# Altium PCB SigmaDelta.PcbDoc
Units mm, origin at the board's own origin, x right, y up, seen from the top; angles counter-clockwise.
Board outline 100 x 114.3 mm, 2 copper layers (Top Layer, Bottom Layer); 79 components, 44 nets, 262 pads, 64 vias.
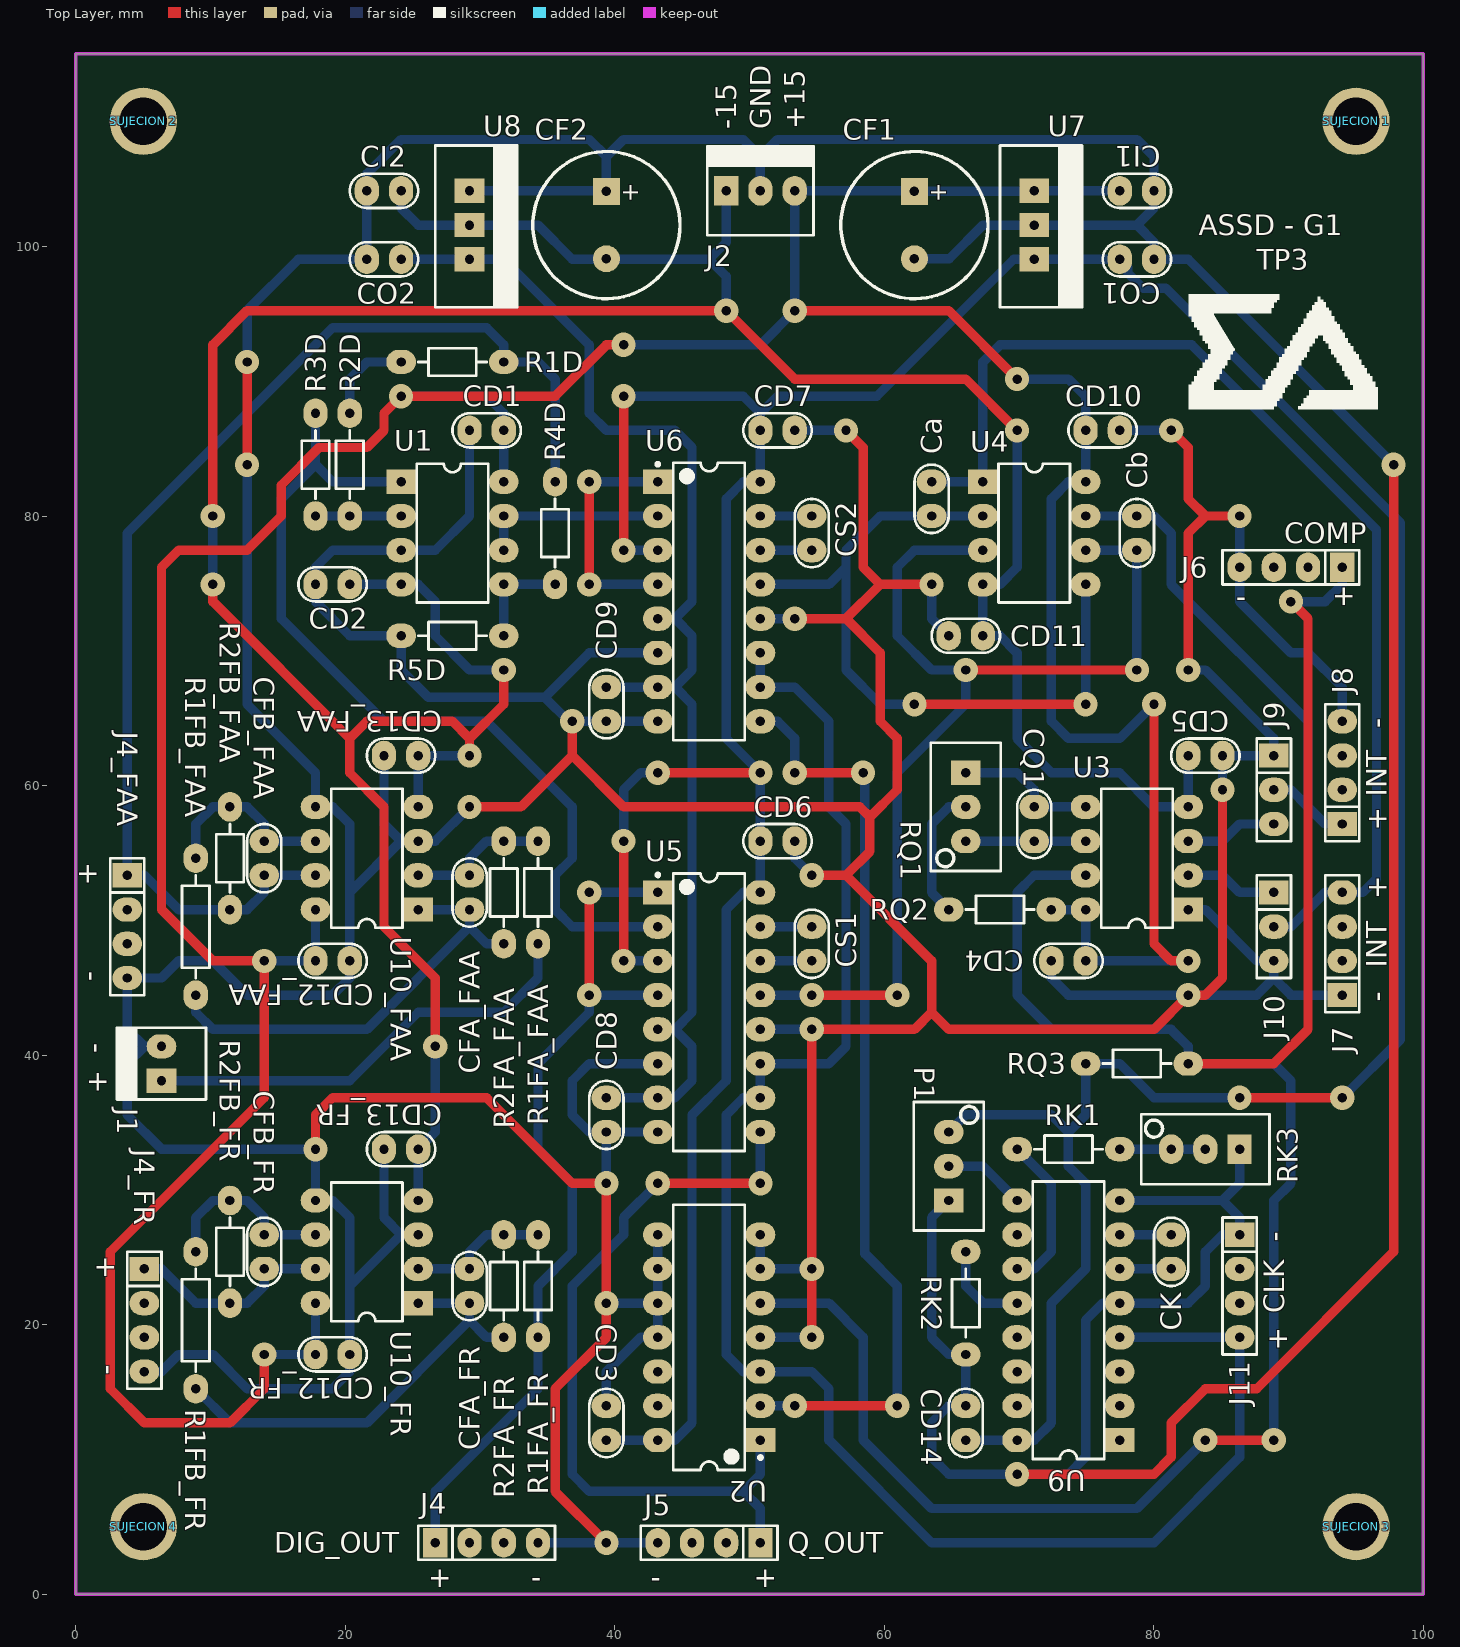
[diagram p0: Top Layer view]
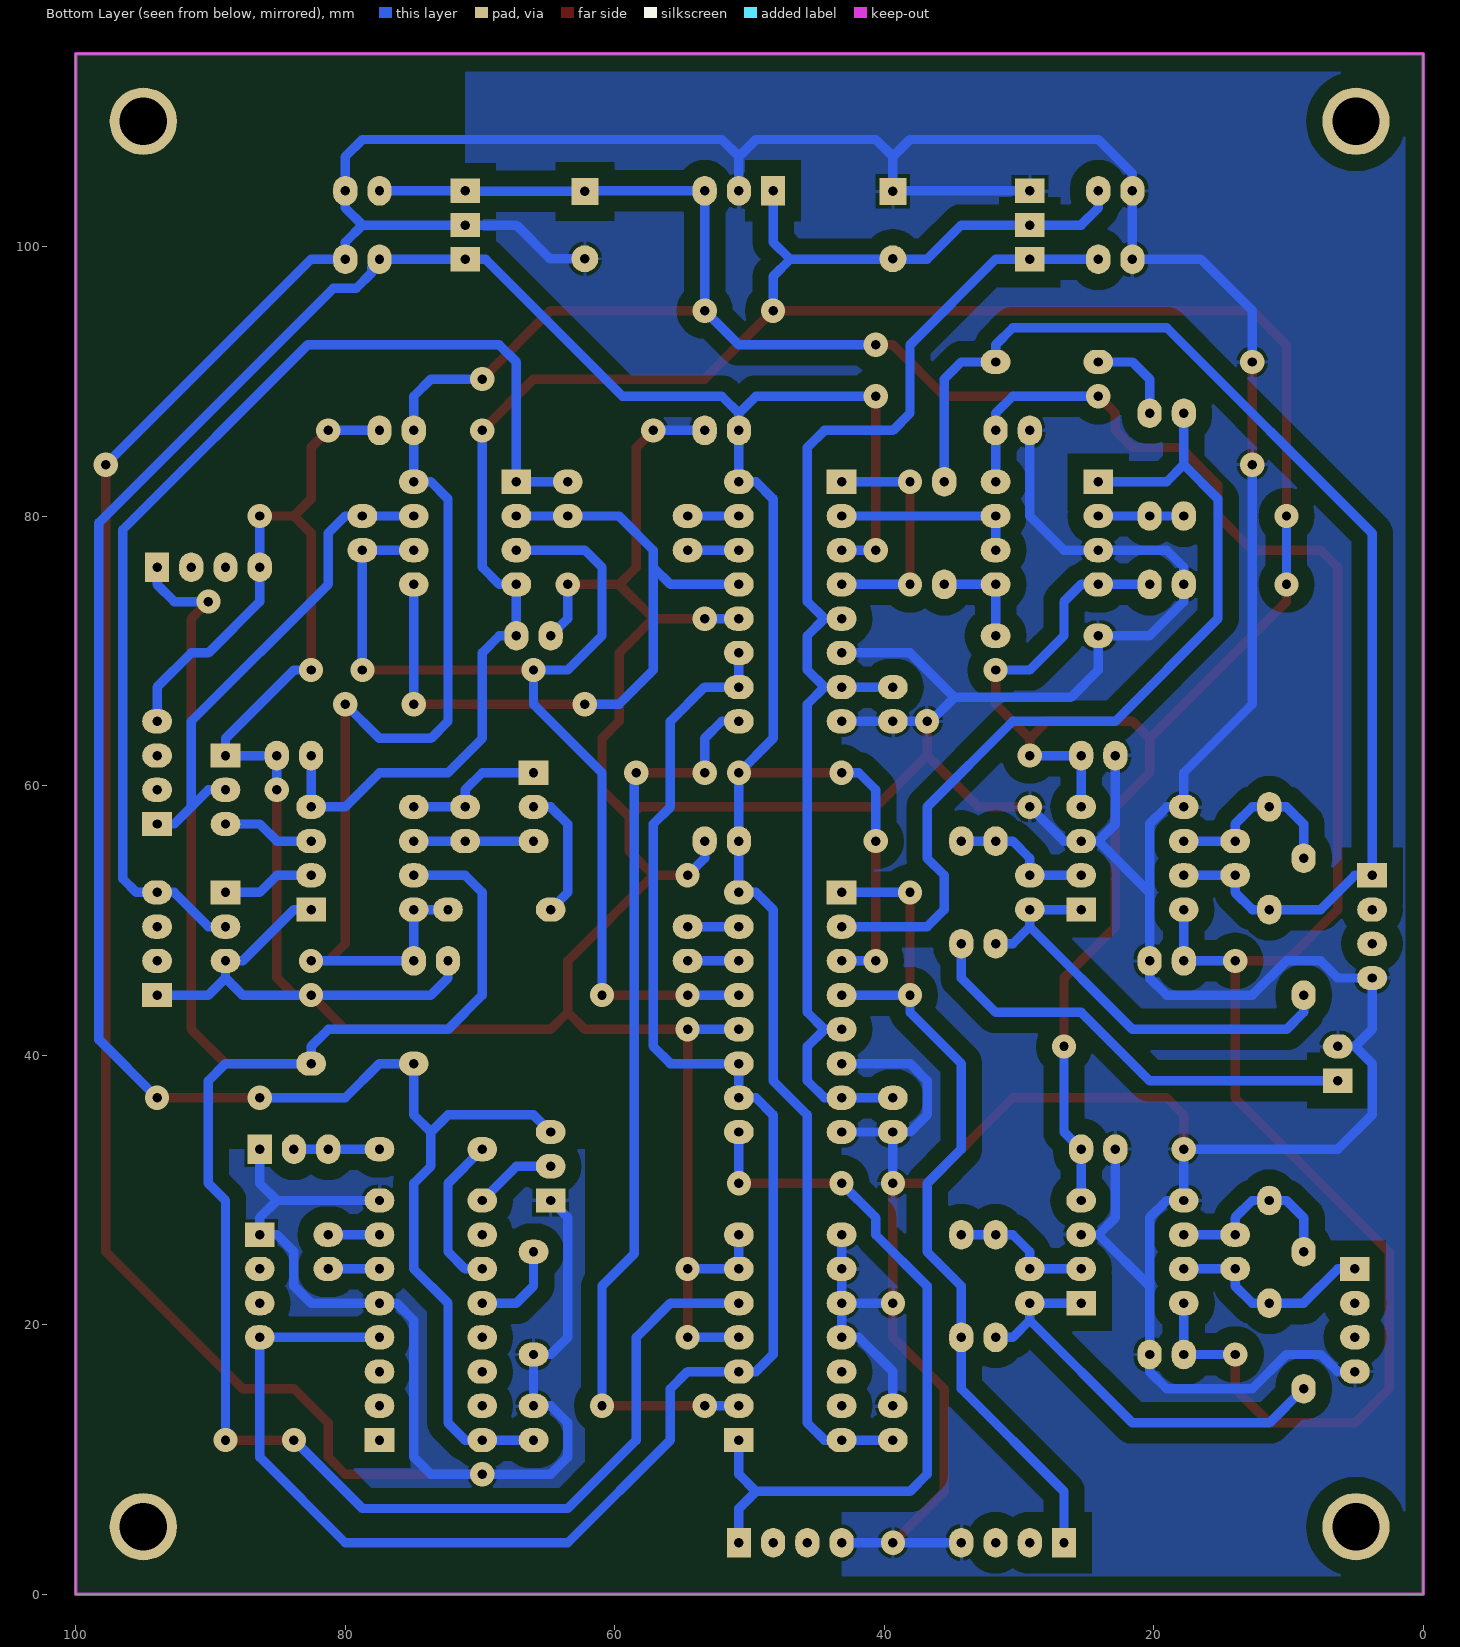
[diagram p1: Bottom Layer view, seen from below]
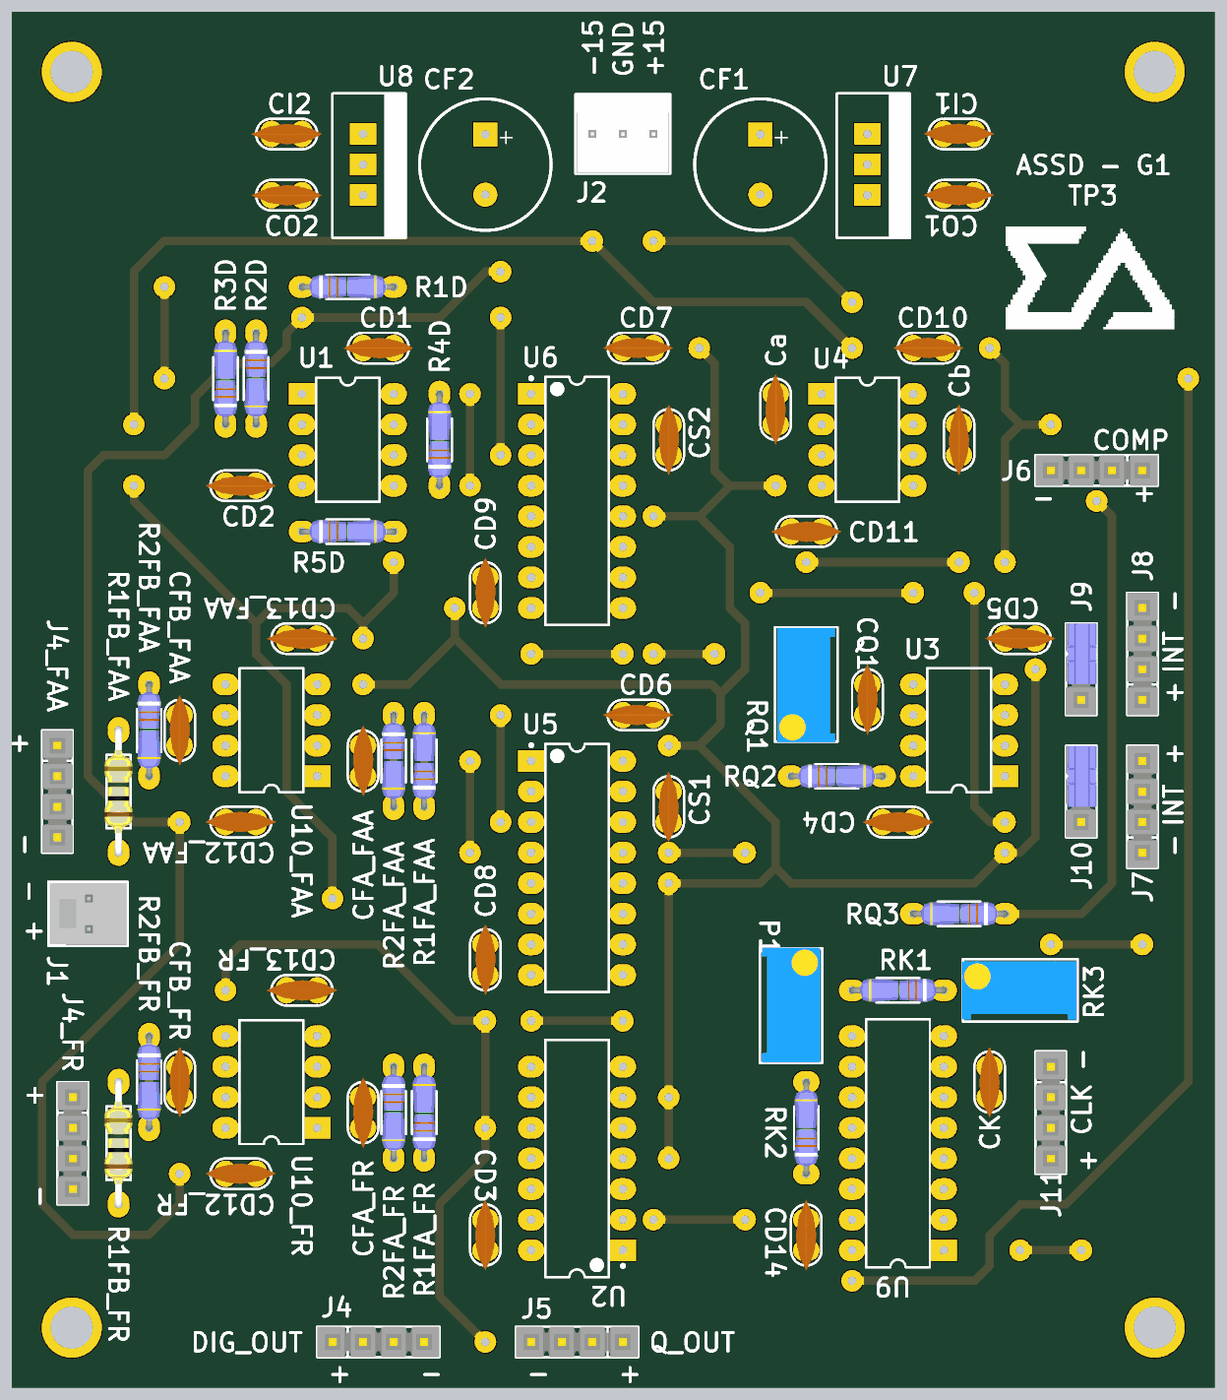
[diagram p2: 3D render of the assembled board from above, using the file's embedded part models]

## Layer stack, top to bottom
Top Solder: solder mask 0.0102, Solder Resist, Dk 3.5
Top Layer: signal copper 0.0356
Dielectric 1: dielectric 0.32, FR-4, Dk 4.8
Bottom Layer: signal copper 0.0356
Bottom Solder: solder mask 0.0102, Solder Resist, Dk 3.5

## Board outline
0,0 100,0 100,114.3 0,114.3

## Design rules (kind name [scope] priority, off if disabled: settings)
Clearance [All] p1: gap=0.7
PolygonConnect [All] p1: connectstyle=Relief reliefconductorwidth=0.254 reliefentries=4 polygonreliefangle="90 Angle" airgapwidth=0.254
RoutingVias [All] p1: holewidth=0.7 width=1.8 viastyle="Through Hole" minholewidth=0.7 minwidth=1.8 maxholewidth=0.7 maxwidth=1.8
SolderMaskExpansion [All] p1: expansion=0.102
Width [All] p1: maxlimit=0.7 minlimit=0.7 preferedwidth=0.7
30 further rules are at their usual default settings.

## Classes and differential pairs
component class ConversorSigmaDelta: J1 ROT6 "SUJECION 1" "SUJECION 2" "SUJECION 3" "SUJECION 4"
component class FAA: CD12_FAA CD13_FAA CFA_FAA CFB_FAA J4_FAA R1FA_FAA R1FB_FAA R2FA_FAA R2FB_FAA ROT8_FAA U10_FAA
component class FR: CD12_FR CD13_FR CFA_FR CFB_FR J4_FR R1FA_FR R1FB_FR R2FA_FR R2FB_FR ROT8_FR U10_FR
component class U_Alimentacion: CF1 CF2 CI1 CI2 CO1 CO2 J2 ROT5 U7 U8
component class U_EntradaDiferencial: CD1 CD2 R1D R2D R3D R4D R5D ROT1 U1
component class U_FFD: CD3 J5 ROT2 U2
component class U_Oscilador: CD14 CK J11 P1 RK1 RK2 RK3 ROT7 U9
component class U_Quantizer: CD4 CD5 CQ1 J6 J7 J8 J9 J10 ROT3 RQ1 RQ2 RQ3 U3
component class U_SC_Integrador: Ca Cb CD6 CD7 CD8 CD9 CD10 CD11 CS1 CS2 J4 ROT4 U4 U5 U6
channel class Filtro: FAA FR

## Components (designator, comment, footprint, x,y, rotation, side; value= is the part's Value field where it differs from the comment)
Ca "100n" CAP100 63.5,81.28 r90 top
Cb "100n" CAP100 78.74,78.74 r90 top
CD1 "100n" CAP100 30.48,86.36 r180 top
CD2 "100n" CAP100 19.05,74.93 r180 top
CD3 "100n" CAP100 39.37,12.7 r90 top
CD4 "100n" CAP100 73.66,46.99 r180 top
CD5 "100n" CAP100 83.82,62.23 r0 top
CD6 "100n" CAP100 52.07,55.88 r0 top
CD7 "100n" CAP100 52.07,86.36 r0 top
CD8 "100n" CAP100 39.37,35.56 r270 top
CD9 "100n" CAP100 39.37,66.04 r270 top
CD10 "100n" CAP100 76.2,86.36 r0 top
CD11 "100n" CAP100 66.04,71.12 r180 top
CD12_FAA "100n" CAP100 19.05,46.99 r0 top (schematic designator CD12)
CD12_FR "100n" CAP100 19.05,17.78 r0 top (schematic designator CD12)
CD13_FAA "100n" CAP100 24.13,62.23 r180 top (schematic designator CD13)
CD13_FR "100n" CAP100 24.13,33.02 r180 top (schematic designator CD13)
CD14 "100n" CAP100 66.04,12.7 r90 top
CF1 "330u" CAP200RP 62.23,101.6 r270 top
CF2 "330u" CAP200RP 39.37,101.6 r270 top
CFA_FAA "10n" CAP100 29.21,52.07 r270 top (schematic designator CFA)
CFA_FR "10n" CAP100 29.21,22.86 r270 top (schematic designator CFA)
CFB_FAA "10n" CAP100 13.97,54.61 r270 top (schematic designator CFB)
CFB_FR "10n" CAP100 13.97,25.4 r270 top (schematic designator CFB)
CI1 "220n" CAP100 78.74,104.14 r0 top
CI2 "220n" CAP100 22.86,104.14 r180 top
CK "100n" CAP100 81.28,25.4 r90 top
CO1 "100n" CAP100 78.74,99.06 r0 top
CO2 "100n" CAP100 22.86,99.06 r180 top
CQ1 "10n" CAP100 71.12,57.15 r270 top
CS1 "1n" CAP100 54.61,48.26 r90 top
CS2 "1n" CAP100 54.61,78.74 r270 top
J1 "INPUT" MOLEX2 6.35,38.1 r90 top
J2 "FUENTE" MOLEX3 48.26,104.14 r0 top
J4 "DIG_OUT" SIP4 30.48,3.81 r0 top
J4_FAA "F_OUT" SIP4 3.81,49.53 r270 top (schematic designator J4)
J4_FR "F_OUT" SIP4 5.08,20.32 r270 top (schematic designator J4)
J5 "DIG_OUT" SIP4 46.99,3.81 r180 top
J6 "OUT_COMP" SIP4 90.17,76.2 r180 top
J7 "+INT" SIP4 93.98,48.26 r90 top
J8 "-INT" SIP4 93.98,60.96 r90 top
J9 "CALIBRATE" JUMPER3 88.9,59.69 r270 top
J10 "CALIBRATE" JUMPER3 88.9,49.53 r270 top
J11 "CLK_OUT" SIP4 86.36,22.86 r270 top
P1 "10K" "PRESET V" 64.77,31.75 r90 top
R1D "1K" RES300#1 24.13,91.44 r0 top
R1FA_FAA "2K7" RES300#1 34.29,48.26 r90 top (schematic designator R1FA)
R1FA_FR "2K7" RES300#1 34.29,19.05 r90 top (schematic designator R1FA)
R1FB_FAA "2K7" RES400 8.89,44.45 r90 top (schematic designator R1FB)
R1FB_FR "2K7" RES400 8.89,15.24 r90 top (schematic designator R1FB)
R2D "1K" RES300#1 20.32,87.63 r270 top
R2FA_FAA "2K7" RES300#1 31.75,55.88 r270 top (schematic designator R2FA)
R2FA_FR "2K7" RES300#1 31.75,26.67 r270 top (schematic designator R2FA)
R2FB_FAA "2K7" RES300#1 11.43,58.42 r270 top (schematic designator R2FB)
R2FB_FR "2K7" RES300#1 11.43,29.21 r270 top (schematic designator R2FB)
R3D "1K" RES300#1 17.78,80.01 r90 top
R4D "1K" RES300#1 35.56,74.93 r90 top
R5D "1K" RES300#1 24.13,71.12 r0 top
RK1 "RES" RES300#1 77.47,33.02 r180 top
RK2 "RES" RES300#2 66.04,17.78 r90 top
RK3 "10K" "PRESET V" 83.82,33.02 r180 top
RQ1 "5K" "PRESET V" 66.04,58.42 r270 top
RQ2 "3K3" RES300#1 64.77,50.8 r0 top
RQ3 "1K" RES300#1 82.55,39.37 r180 top
"SUJECION 1" "SUJECION" "SUJECION (5.00MM - 3.50MM)" 95,109.3 r90 top
"SUJECION 2" "SUJECION" "SUJECION (5.00MM - 3.50MM)" 5,109.3 r90 top
"SUJECION 3" "SUJECION" "SUJECION (5.00MM - 3.50MM)" 95,5 r90 top
"SUJECION 4" "SUJECION" "SUJECION (5.00MM - 3.50MM)" 5,5 r90 top
U1 "TL082JG" JG008 27.94,78.74 r270 top
U2 "CD4013BCN" N14A 46.99,19.05 r180 top
U3 "LM311N" 626-05 78.74,54.61 r90 top
U4 "TL082JG" JG008 71.12,78.74 r270 top
U5 "CD4053BCN" N16E#1 46.99,43.18 r0 top
U6 "CD4053BCN" N16E#1 46.99,73.66 r0 top
U7 "7805" "TO-220 V" 71.12,101.6 r270 top
U8 "7905" "TO-220 V" 29.21,101.6 r270 top
U9 "CD4046BCN" N16E#2 73.66,20.32 r90 top
U10_FAA "TL082JG" JG008 21.59,54.61 r90 top (schematic designator U10)
U10_FR "TL082JG" JG008 21.59,25.4 r90 top (schematic designator U10)

## Footprints (in the part's own frame and the unit in brackets; to place one, negate y for a bottom-side part, rotate by r counter-clockwise, add the part's x,y. Pads: shape width x height; smd on the part's side, far side on the other; paste and mask are expansions set on the pad)
626-05 [mm] "DIP; 8 Leads; Row Spacing 7.62 mm; Pitch 2.54 mm"
  rect 1.8x2.2 hole 0.7: 1(-3.81,-3.81)
  oval 1.8x2.2 hole 0.7: 2(-1.27,-3.81) 3(1.27,-3.81) 4(3.81,-3.81) 5(3.81,3.81) 6(1.27,3.81) 7(-1.27,3.81) 8(-3.81,3.81)
  silkscreen extent -5.15,-2.65 5.15,2.65
CAP100 [mm]
  oval 1.8x2.2 hole 0.7: 1(-1.27,0) 2(1.27,0)
  silkscreen extent -2.54,-1.27 2.54,1.27, body extent -2.92,-0.84 2.92,0.86, height 6.12
CAP200RP [mm] "Body Diameter 10.33mm"
  rect 2x2 hole 0.7: 1(-2.5,0)
  round 2 hole 0.7: 2(2.5,0)
  silkscreen extent -5.46,-5.46 5.46,5.46, body extent -5.2,-5.18 5.18,5.21, height 20
JG008 [mm] "DIP; 8 Leads; Row Spacing 7.62 mm; Pitch 2.54 mm"
  rect 1.8x2.2 hole 0.7: 1(-3.81,-3.81)
  oval 1.8x2.2 hole 0.7: 2(-1.27,-3.81) 3(1.27,-3.81) 4(3.81,-3.81) 5(3.81,3.81) 6(1.27,3.81) 7(-1.27,3.81) 8(-3.81,3.81)
  silkscreen extent -5.15,-2.65 5.15,2.65
JUMPER3 [mm]
  rect 1.8x2.2 hole 0.7: 1(-2.54,0)
  oval 1.8x2.2 hole 0.7: 2(0,0) 3(2.54,0)
  silkscreen extent -3.81,-1.27 3.81,1.27, body extent -3.81,-1.3 3.81,1.27, height 16.15
MOLEX2 [mm]
  rect 1.8x2.2 hole 0.7: 1(0,0)
  oval 1.8x2.2 hole 0.7: 2(2.54,0)
  silkscreen extent -1.4,-3.3 3.94,3.3, body extent -1.27,-3.17 3.81,3.18, height 10.74
MOLEX3 [mm]
  rect 1.8x2.2 hole 0.7: 1(0,0)
  oval 1.8x2.2 hole 0.7: 2(2.54,0) 3(5.08,0)
  silkscreen extent -1.4,-3.3 6.48,3.3, body extent -1.27,-3.17 6.35,3.17, height 10.74
N14A [mm] "DIP, 14-Leads, Row Spacing 7.62mm, Pitch 2.54mm, Body 19.18x6.35mm"
  rect 2.2x1.8 hole 0.7: 1(-3.81,7.62)
  oval 2.2x1.8 hole 0.7: 2(-3.81,5.08) 3(-3.81,2.54) 4(-3.81,0) 5(-3.81,-2.54) 6(-3.81,-5.08) 7(-3.81,-7.62) 8(3.81,-7.62) 9(3.81,-5.08) 10(3.81,-2.54) 11(3.81,0) 12(3.81,2.54) 13(3.81,5.08) 14(3.81,7.62)
  silkscreen extent -3.94,-9.85 2.65,9.85, body extent -3.55,-9.85 3.55,9.85, height 5.08
N16E#1 [mm] "DIP, 16-Leads, Row Spacing 7.62mm, Pitch 2.54mm, Body 19.3x6.35mm"
  rect 2.2x1.8 hole 0.7: 1(-3.81,8.89)
  oval 2.2x1.8 hole 0.7: 2(-3.81,6.35) 3(-3.81,3.81) 4(-3.81,1.27) 5(-3.81,-1.27) 6(-3.81,-3.81) 7(-3.81,-6.35) 8(-3.81,-8.89) 9(3.81,-8.89) 10(3.81,-6.35) 11(3.81,-3.81) 12(3.81,-1.27) 13(3.81,1.27) 14(3.81,3.81) 15(3.81,6.35) 16(3.81,8.89)
  silkscreen extent -3.93,-10.3 2.65,10.31, body extent -3.6,-10.28 3.6,10.28, height 5.08
N16E#2 [mm] "DIP; 16 Leads; Row Spacing 7.62 mm; Pitch 2.54 mm"
  rect 1.8x2.2 hole 0.7: 1(-8.89,-3.81)
  oval 1.8x2.2 hole 0.7: 2(-6.35,-3.81) 3(-3.81,-3.81) 4(-1.27,-3.81) 5(1.27,-3.81) 6(3.81,-3.81) 7(6.35,-3.81) 8(8.89,-3.81) 9(8.89,3.81) 10(6.35,3.81) 11(3.81,3.81) 12(1.27,3.81) 13(-1.27,3.81) 14(-3.81,3.81) 15(-6.35,3.81) 16(-8.89,3.81)
  silkscreen extent -10.3,-2.65 10.3,2.65
"PRESET V" [mm]
  rect 1.8x2.2 hole 0.7: 1(-2.54,0)
  oval 1.8x2.2 hole 0.7: 2(0,0) 3(2.54,0)
  silkscreen extent -4.76,-2.6 4.76,2.6, body extent -4.7,-2.42 4.83,2.42, height 11.55
RES300#1 [mm]
  oval 2.2x1.8 hole 0.7: 1(0,0) 2(7.62,0)
  silkscreen extent 1.27,-1.02 6.35,1.02, body extent -0.25,-0.97 7.87,0.97, height 2.01
RES300#2 [mm]
  oval 1.8x2.2 hole 0.7: 1(0,0) 2(7.62,0)
  silkscreen extent 1.27,-1.02 6.35,1.02, body extent -0.25,-0.97 7.87,0.97, height 2.01
RES400 [mm]
  oval 2.2x1.8 hole 0.7: 1(0,0) 2(10.16,0)
  silkscreen extent 1.27,-1.02 8.89,1.02, body extent -0.3,-1.14 10.46,1.17, height 2.43
SIP4 [mm]
  rect 1.8x2.2 hole 0.7: 1(-3.81,0)
  oval 1.8x2.2 hole 0.7: 2(-1.27,0) 3(1.27,0) 4(3.81,0)
  silkscreen extent -5.08,-1.27 5.08,1.27, body extent -5.08,-1.27 5.08,1.27, height 8.38
"SUJECION (5.00MM - 3.50MM)" [mm]
  round 5 hole 3.5: 1(0,0)
"TO-220 V" [mm]
  rect 1.8x2.2 hole 0.7: 1(-2.54,0) 2(0,0) 3(2.54,0)
  silkscreen extent -5.9,-2.54 6.1,3.54, body extent -5,-2 5,3, height 18

## Part data
Ca Cb CD1 CD2 CD3 CD4 CD5 CD6 CD7 CD8 CD9 CD10 CD11 CD12_FAA CD12_FR CD13_FAA CD13_FR CD14 CFA_FAA CFA_FR CFB_FAA CFB_FR CI1 CI2 CK CO1 CO2 CQ1 CS1 CS2: library part CAP
CF1 CF2: library part CAPPOL
J1: library part MOLEX2
J2: library part MOLEX3
J4 J4_FAA J4_FR J5 J6 J7 J8 J11: library part CON4
J9 J10: library part JUMPER3
P1 RK3 RQ1: library part PRESET
R1D R1FA_FAA R1FA_FR R1FB_FAA R1FB_FR R2D R2FA_FAA R2FA_FR R2FB_FAA R2FB_FR R3D R4D R5D RQ2 RQ3: library part RES
U1 U4 U10_FAA U10_FR: "JFET-Input Operational Amplifier"
U2: "Dual D-Type Flip-Flop"
U3: "High-Performance Voltage Comparator"
U5 U6: "Triple 2-Channnel Analog Multiplexer/Demutiplexer"
U7: library part 78XX, "REGULDOR POSITIVO"
U8: library part 79XX, "REGULADOR NEGATIVO"
U9: "Micropower Phase-Locked Loop"

## Via types
v1: diameter 1.8, hole 0.7, Top Layer to Bottom Layer, 64 vias

## Nets (pads, with @x,y where several pads share a name; then routed paths per layer and width w, separated by ;. In a path a pad name is that pad's centre, name@x,y a point inside that pad or via, vN(x,y) a via of type N, cw(c..) or ccw(c..) an arc to the next point about the centre after c; other vN are vias at no path point)
+15V: CD1.1 CD4.1 CD10.1 CD12_FAA.1 CD12_FR.1 CF1.1 CI1.1 J2.3 RQ2.2 U1.8 U3.8 U4.8 U7.1 U10_FAA.8 U10_FR.8 | length 299.9
  Top Layer w0.7: v1(13.97,17.78) 13.97,15.24 11.43,12.7 5.08,12.7 2.54,15.24 2.54,25.4 13.97,36.83 v1(13.97,46.99) 10.16,46.99 6.35,50.8 6.35,76.2 7.62,77.47 12.7,77.47 15.24,80.01 15.24,82.296 18.034,85.09 21.59,85.09 22.86,86.36 22.86,87.63 v1(24.13,88.9) 35.56,88.9 39.37,92.71 v1(40.64,92.71) ; v1(53.34,95.25) 64.77,95.25 v1(69.85,90.17) ; v1(80.01,66.04) 80.01,48.26 81.28,46.99 v1(82.55,46.99)
  Bottom Layer w0.7: v1(13.97,17.78) CD12_FR.1 U10_FR.8 ; v1(13.97,46.99) CD12_FAA.1 U10_FAA.8 ; v1(24.13,88.9) 30.48,88.9 31.75,87.63 CD1.1 U1.8 ; v1(40.64,92.71) 50.8,92.71 v1(53.34,95.25) J2.3 CF1.1@62.19,104.14 ; CF1.1 U7.1@71.334,104.1 ; v1(69.85,90.17) 73.66,90.17 74.93,88.9 CD10.1 U4.8 73.66,82.55 72.39,81.28 72.39,64.77 73.66,63.5 77.47,63.5 v1(80.01,66.04) ; U7.1 CI1.1 ; RQ2.2 U3.8 CD4.1 v1(82.55,46.99)
+VREF: CD3.1 CD6.1 CD7.1 CD14.1 CO1.1 P1.3 RQ3.2 U2.14 U5.3 U5.16 U6.3 U6.16 U7.3 U9.16 | length 308.8
  Top Layer w0.7: v1(40.64,46.99) v1(40.64,55.88) ; v1(40.64,77.47) v1(40.64,88.9) ; v1(43.18,60.96) v1(50.8,60.96) ; v1(86.36,36.83) v1(93.98,36.83)
  Bottom Layer w0.7: CD3.1 U2.14 44.45,11.43 45.72,12.7 45.72,35.56 48.26,38.1 48.26,50.8 49.53,52.07 U5.16 CD6.1 v1(50.8,60.96) 48.26,63.5 48.26,81.28 49.53,82.55 U6.16 CD7.1 50.8,87.63 ; v1(40.64,46.99) U5.3 ; v1(40.64,55.88) 40.64,59.69 41.91,60.96 v1(43.18,60.96) ; v1(40.64,77.47) U6.3 ; v1(40.64,88.9) 49.53,88.9 50.8,87.63 ; P1.3 66.04,35.56 72.39,35.56 73.66,34.29 ; CD14.1 U9.16 71.12,11.43 72.39,12.7 72.39,21.59 74.93,24.13 74.93,30.48 73.66,31.75 73.66,34.29 ; v1(86.36,36.83) 80.01,36.83 77.47,39.37 RQ3.2 74.93,35.56 73.66,34.29 ; v1(93.98,36.83) 98.298,41.148 98.298,79.502 80.89,96.91 79.202,96.91 78.06,98.052 78.06,98.47 CO1.1 U7.3 69.596,99.06 59.436,88.9 52.07,88.9 50.8,87.63
-15V: CD2.1 CD5.1 CD11.1 CD13_FAA.1 CD13_FR.1 CF2.2 CI2.1 J2.1 U1.4 U3.4 U4.4 U8.2 U10_FAA.4 U10_FR.4 | length 256.5
  Top Layer w0.7: v1(10.16,74.93) 10.16,73.66 20.32,63.5 ; v1(10.16,80.01) 10.16,92.71 12.7,95.25 v1(48.26,95.25) 53.34,90.17 66.04,90.17 v1(69.85,86.36) ; v1(26.67,40.64) 26.67,45.72 22.86,49.53 22.86,58.42 20.32,60.96 20.32,63.5 ; v1(29.21,62.23) 29.21,63.5 ; v1(31.75,68.58) 31.75,66.04 29.21,63.5 ; 20.32,63.5 21.59,64.77 27.94,64.77 29.21,63.5
  Bottom Layer w0.7: v1(10.16,74.93) v1(10.16,80.01) ; CD2.1 U1.4 25.4,74.93 26.67,73.66 26.67,71.12 29.21,68.58 v1(31.75,68.58) ; CI2.1 24.13,102.87 25.4,101.6 U8.2 34.29,101.6 36.83,99.06 46.99,99.06 ; U10_FR.4 CD13_FR.1 26.67,34.29 v1(26.67,40.64) ; U10_FAA.4 CD13_FAA.1 v1(29.21,62.23) ; v1(48.26,95.25) 48.26,97.79 46.99,99.06 ; J2.1 48.26,100.33 46.99,99.06 ; v1(69.85,86.36) 69.85,76.2 68.58,74.93 U4.4 CD11.1 68.58,71.12 69.85,69.85 69.85,63.5 72.39,60.96 77.47,60.96 80.01,58.42 U3.4 CD5.1
-VREF: CD8.1 CD9.1 CO2.1 U5.5 U5.7 U6.5 U6.7 U8.3 | length 92.5
  Bottom Layer w0.7: CO2.1 U8.3 31.75,99.06 38.1,92.71 38.1,87.63 39.37,86.36 44.45,86.36 45.72,85.09 45.72,73.66 44.45,72.39 45.72,71.12 45.72,68.58 44.45,67.31 45.72,66.04 45.72,43.18 44.45,41.91 ; CD8.1 U5.7 44.45,36.83 45.72,38.1 45.72,40.64 44.45,41.91 ; CD9.1 U6.7 ; U5.5 44.45,41.91
CLK: J11.4 U2.3 U5.10 U5.11 U6.10 U6.11 U9.4 | length 130.1
  Bottom Layer w0.7: U6.11 U6.10 53.34,67.31 55.88,64.77 55.88,58.42 57.15,57.15 57.15,40.64 55.88,39.37 U5.11 U5.10 49.53,36.83 48.26,35.56 48.26,17.78 49.53,16.51 U2.3 54.61,16.51 55.88,15.24 55.88,11.43 63.5,3.81 80.01,3.81 86.36,10.16 J11.4 U9.4
DAC_1BIT_A: J4.1 R1FA_FR.1 U5.1 U5.4 | length 65.3
  Top Layer w0.7: v1(38.1,44.45) v1(38.1,52.07)
  Bottom Layer w0.7: J4.1 26.67,7.62 34.29,15.24 R1FA_FR.1 34.29,22.86 36.83,25.4 36.83,30.48 34.29,33.02 34.29,39.37 38.1,43.18 v1(38.1,44.45) U5.4 ; v1(38.1,52.07) U5.1
DAC_1BIT_B: U6.1 U6.4 | length 17.8
  Top Layer w0.7: v1(38.1,74.93) v1(38.1,82.55)
  Bottom Layer w0.7: v1(38.1,74.93) U6.4 ; v1(38.1,82.55) U6.1
GND: CD1.2 CD2.2 CD3.2 CD4.2 CD5.2 CD6.2 CD7.2 CD8.2 CD9.2 CD10.2 CD11.2 CD12_FAA.2 CD12_FR.2 CD13_FAA.2 CD13_FR.2 CD14.2 CF1.2 CF2.1 CI1.2 CI2.2 CO1.2 CO2.2 J1.2 J2.2 J4.4 J4_FAA.4 J4_FR.4 J5.4 J6.4 J7.1 J8.4 J9.1 J10.3 J11.1 P1.1 R5D.1 RK2.1 RK3.1 U1.3 U2.4 U2.6 U2.7 U2.8 U2.9 U2.10 U2.11 U3.1 U5.6 U5.8 U5.12 U6.6 U6.8 U6.12 U7.2 U8.1 U9.5 U9.8 U10_FAA.3 U10_FAA.5 U10_FR.3 U10_FR.5 | length 939
  Top Layer w0.7: v1(12.7,83.82) v1(12.7,91.44) ; v1(17.78,33.02) 17.78,35.56 19.05,36.83 30.48,36.83 36.83,30.48 v1(39.37,30.48) v1(39.37,21.59) 39.37,19.05 35.56,15.24 35.56,7.62 v1(39.37,3.81) ; v1(29.21,58.42) 33.02,58.42 36.83,62.23 ; v1(36.83,64.77) 36.83,62.23 ; v1(53.34,72.39) 57.15,72.39 ; v1(54.61,19.05) v1(54.61,24.13) v1(54.61,41.91) 62.23,41.91 63.5,43.18 ; v1(54.61,53.34) 57.15,53.34 ; v1(57.15,86.36) 58.42,85.09 58.42,76.2 59.69,74.93 ; v1(63.5,74.93) 59.69,74.93 ; v1(69.85,8.89) 80.01,8.89 81.28,10.16 81.28,12.7 83.82,15.24 87.63,15.24 97.79,25.4 v1(97.79,83.82) ; v1(81.28,86.36) 82.55,85.09 82.55,81.28 83.82,80.01 ; v1(82.55,68.58) 82.55,78.74 83.82,80.01 ; v1(85.09,59.69) 85.09,45.72 83.82,44.45 v1(82.55,44.45) 80.01,41.91 64.77,41.91 63.5,43.18 ; v1(86.36,80.01) 83.82,80.01 ; 36.83,62.23 40.64,58.42 58.166,58.42 58.928,57.658 ; 57.15,53.34 58.928,55.118 58.928,57.658 ; 57.15,53.34 63.5,46.99 63.5,43.18 ; 57.15,72.39 59.69,74.93 ; 57.15,72.39 59.69,69.85 59.69,64.77 60.96,63.5 60.96,59.69 58.928,57.658
  Bottom Layer w0.7: J4_FR.4 6.35,16.51 7.62,17.78 10.16,17.78 12.7,15.24 19.05,15.24 20.32,16.51 CD12_FR.2 20.32,22.86 ; J1.2 5.08,40.64 ; v1(12.7,83.82) 12.7,66.04 17.78,60.96 U10_FAA.5 19.05,58.42 20.32,57.15 20.32,52.07 ; v1(12.7,91.44) 12.7,95.25 16.51,99.06 CO2.2 CI2.2 21.59,105.41 24.13,107.95 38.1,107.95 39.37,106.68 ; CD13_FR.2 22.86,27.94 24.13,26.67 ; CD13_FAA.2 22.86,57.15 24.13,55.88 ; U10_FR.3 24.13,26.67 ; v1(29.21,58.42) 26.67,55.88 U10_FAA.3 24.13,55.88 ; CD1.2 29.21,80.01 26.67,77.47 U1.3 19.05,77.47 17.78,76.2 CD2.2 17.78,73.66 20.32,71.12 R5D.1 24.13,68.58 26.162,66.548 34.798,66.548 ; U8.1 CF2.1@39.33,104.14 ; J4.4 v1(39.37,3.81) J5.4 ; CD3.2 39.37,16.51 41.91,19.05 U2.11 U2.10 ; v1(39.37,21.59) U2.10 ; v1(39.37,30.48) CD8.2 ; CF2.1 39.37,106.68 ; U2.8 U2.9 U2.10 ; U5.8 CD8.2 ; U5.6 38.1,39.37 36.83,38.1 36.83,35.56 38.1,34.29 CD8.2 ; U6.8 CD9.2 v1(36.83,64.77) 36.576,64.77 34.798,66.548 ; U6.6 38.1,69.85 34.798,66.548 ; U2.4 v1(54.61,19.05) ; U2.7 U2.6 v1(54.61,24.13) ; U5.12 v1(54.61,41.91) ; U6.12 v1(53.34,72.39) ; J2.2 50.8,106.68 ; CD6.2 53.34,54.61 v1(54.61,53.34) ; CD7.2 v1(57.15,86.36) ; CF1.2 64.81,99.1 67.31,101.6 78.74,101.6 ; v1(63.5,74.93) 63.5,72.39 CD11.2 ; P1.1 63.5,27.94 63.5,19.05 64.77,17.78 RK2.1 CD14.2 64.77,13.97 63.5,12.7 63.5,10.16 64.77,8.89 v1(69.85,8.89) 73.66,8.89 74.93,10.16 74.93,20.32 76.2,21.59 U9.5 82.55,21.59 83.82,22.86 83.82,25.4 85.09,26.67 J11.1 86.36,27.94 85.09,29.21 ; CD4.2 72.39,45.72 73.66,44.45 v1(82.55,44.45) 87.63,44.45 88.9,45.72 ; U9.8 85.09,29.21 ; CD10.2 v1(81.28,86.36) ; U3.1 83.82,50.8 87.63,46.99 J10.3 88.9,45.72 ; v1(82.55,68.58) 83.82,68.58 88.9,63.5 J9.1 CD5.2 v1(85.09,59.69) ; RK3.1 86.36,30.48 85.09,29.21 ; v1(86.36,80.01) J6.4 86.36,73.66 90.17,69.85 91.44,69.85 93.98,67.31 J8.4 ; J7.1 90.17,44.45 88.9,45.72 ; v1(97.79,83.82) 82.55,99.06 CO1.2 80.01,100.33 78.74,101.6 ; 5.08,40.64 3.81,39.37 3.81,35.56 6.35,33.02 v1(17.78,33.02) U10_FR.5 19.05,29.21 20.32,27.94 20.32,22.86 ; 5.08,40.64 3.81,41.91 J4_FAA.4 6.35,45.72 7.62,46.99 10.16,46.99 12.7,44.45 19.05,44.45 20.32,45.72 CD12_FAA.2 20.32,52.07 ; 20.32,22.86 24.13,26.67 ; 20.32,52.07 24.13,55.88 ; 39.37,106.68 40.64,107.95 49.53,107.95 50.8,106.68 ; 50.8,106.68 52.07,107.95 78.74,107.95 80.01,106.68 CI1.2 80.01,102.87 78.74,101.6
NetCa_2: Ca.2 J7.4 J10.2 U4.1 | length 83.1
  Bottom Layer w0.7: Ca.2 U4.1 67.31,91.44 68.58,92.71 82.804,92.71 96.52,78.994 96.52,53.086 95.504,52.07 J7.4 92.71,52.07 90.17,49.53 J10.2
NetCb_2: Cb.2 J8.1 J9.2 U4.7 | length 37.5
  Bottom Layer w0.7: U4.7 Cb.2 80.01,80.01 81.28,78.74 81.28,74.93 91.44,64.77 91.44,58.42 ; J9.2 90.17,59.69 91.44,58.42 ; J8.1 92.71,57.15 91.44,58.42
NetCFA_FAA_1: CFA_FAA.1 R1FA_FAA.2 R2FA_FAA.1 U10_FAA.2 | length 10.7
  Bottom Layer w0.7: U10_FAA.2 CFA_FAA.1 29.21,54.61 30.48,55.88 R2FA_FAA.1 R1FA_FAA.2
NetCFA_FAA_2: CFA_FAA.2 R1FB_FAA.1 R2FA_FAA.2 U10_FAA.1 | length 33.4
  Bottom Layer w0.7: R1FB_FAA.1 8.89,43.18 10.16,41.91 21.59,41.91 29.21,49.53 ; U10_FAA.1 CFA_FAA.2 29.21,49.53 ; R2FA_FAA.2 30.48,48.26 29.21,49.53
NetCFA_FR_1: CFA_FR.1 R1FA_FR.2 R2FA_FR.1 U10_FR.2 | length 10.7
  Bottom Layer w0.7: U10_FR.2 CFA_FR.1 29.21,25.4 30.48,26.67 R2FA_FR.1 R1FA_FR.2
NetCFA_FR_2: CFA_FR.2 R1FB_FR.1 R2FA_FR.2 U10_FR.1 | length 32.7
  Bottom Layer w0.7: R1FB_FR.1 11.43,12.7 21.59,12.7 29.21,20.32 ; U10_FR.1 CFA_FR.2 29.21,20.32 ; R2FA_FR.2 30.48,19.05 29.21,20.32
NetCFB_FAA_1: CFB_FAA.1 R1FB_FAA.2 R2FB_FAA.1 U10_FAA.6 | length 13.8
  Bottom Layer w0.7: R1FB_FAA.2 8.89,57.15 10.16,58.42 R2FB_FAA.1 12.7,58.42 13.97,57.15 CFB_FAA.1 U10_FAA.6
NetCFB_FR_1: CFB_FR.1 R1FB_FR.2 R2FB_FR.1 U10_FR.6 | length 13.8
  Bottom Layer w0.7: R1FB_FR.2 8.89,27.94 10.16,29.21 R2FB_FR.1 12.7,29.21 13.97,27.94 CFB_FR.1 U10_FR.6
NetCFB_FR_2: CFB_FR.2 J4_FR.1 R2FB_FR.2 U10_FR.7 | length 15.5
  Bottom Layer w0.7: J4_FR.1 6.35,24.13 8.89,21.59 R2FB_FR.2 12.7,21.59 13.97,22.86 CFB_FR.2 U10_FR.7
NetCK_1: CK.1 U9.6 | length 3.8
  Bottom Layer w0.7: U9.6 CK.1
NetCK_2: CK.2 U9.7 | length 3.8
  Bottom Layer w0.7: U9.7 CK.2
NetCQ1_1: CQ1.1 RQ1.1 U3.5 | length 10.7
  Bottom Layer w0.7: RQ1.1 69.85,60.96 71.12,59.69 CQ1.1 U3.5
NetCQ1_2: CQ1.2 RQ1.3 U3.6 | length 8.9
  Bottom Layer w0.7: RQ1.3 CQ1.2 U3.6
NetCS1_1: CS1.1 U5.14 | length 3.8
  Bottom Layer w0.7: U5.14 CS1.1
NetCS1_2: CS1.2 U5.15 | length 3.8
  Bottom Layer w0.7: U5.15 CS1.2
NetCS2_1: CS2.1 U6.15 | length 3.8
  Bottom Layer w0.7: U6.15 CS2.1
NetCS2_2: CS2.2 U6.14 | length 3.8
  Bottom Layer w0.7: U6.14 CS2.2
NetJ1_1: J1.1 R1FA_FAA.1 | length 33.6
  Bottom Layer w0.7: J1.1 20.32,38.1 25.4,43.18 31.75,43.18 34.29,45.72 R1FA_FAA.1
NetJ5_1: J5.1 U2.1 U5.9 | length 57.5
  Top Layer w0.7: v1(43.18,30.48) v1(50.8,30.48)
  Bottom Layer w0.7: v1(43.18,30.48) 40.64,27.94 40.64,26.67 36.83,22.86 36.83,8.89 38.1,7.62 49.53,7.62 ; J5.1 50.8,6.35 49.53,7.62 ; U2.1 50.8,8.89 49.53,7.62 ; v1(50.8,30.48) U5.9
NetJ6_1: J6.1 RQ3.1 U2.5 U3.7 | length 162.9
  Top Layer w0.7: RQ3.1 88.9,39.37 91.44,41.91 91.44,72.39 v1(90.17,73.66) ; v1(83.82,11.43) v1(88.9,11.43)
  Bottom Layer w0.7: U2.5 55.88,21.59 58.42,19.05 58.42,11.43 63.5,6.35 78.74,6.35 v1(83.82,11.43) ; U3.7 71.12,53.34 69.85,52.07 69.85,44.45 72.39,41.91 81.28,41.91 82.55,40.64 RQ3.1 88.9,39.37 90.17,38.1 90.17,30.48 88.9,29.21 v1(88.9,11.43) ; v1(90.17,73.66) 92.71,73.66 93.98,74.93 J6.1
NetJ9_3: J9.3 U3.3 | length 6.9
  Bottom Layer w0.7: U3.3 85.09,55.88 86.36,57.15 J9.3
NetJ10_1: J10.1 U3.2 | length 6.9
  Bottom Layer w0.7: U3.2 85.09,53.34 86.36,52.07 J10.1
NetP1_2: P1.2 U9.9 | length 6.1
  Bottom Layer w0.7: P1.2 67.31,31.75 U9.9
NetR1D_1: R1D.1 R2D.1 | length 6.9
  Bottom Layer w0.7: R2D.1 20.32,90.17 21.59,91.44 R1D.1
NetR2D_2: R2D.2 R3D.1 U1.2 | length 6.3
  Bottom Layer w0.7: R3D.1 R2D.2 U1.2
NetR3D_2: R3D.2 U1.1 U5.2 | length 66.8
  Bottom Layer w0.7: R3D.2 17.78,83.82 ; U1.1 19.05,82.55 17.78,83.82 ; U5.2 36.83,49.53 35.56,50.8 35.56,53.34 36.83,54.61 36.83,58.42 30.48,64.77 22.86,64.77 15.24,72.39 15.24,81.28 17.78,83.82
NetR4D_1: R4D.1 R5D.2 U1.5 | length 7.6
  Bottom Layer w0.7: R5D.2 U1.5 R4D.1
NetRK1_1: RK1.1 RK3.2 RK3.3 | length 6.3
  Bottom Layer w0.7: RK1.1 RK3.3 RK3.2
NetRK1_2: RK1.2 U9.11 | length 11.7
  Bottom Layer w0.7: U9.11 71.12,24.13 72.39,25.4 72.39,30.48 RK1.2
NetRK2_2: RK2.2 U9.12 | length 6.9
  Bottom Layer w0.7: RK2.2 66.04,22.86 67.31,21.59 U9.12
NetRQ1_2: RQ1.2 RQ2.1 | length 9.9
  Bottom Layer w0.7: RQ2.1 63.5,52.07 63.5,57.15 64.77,58.42 RQ1.2
NetU1_6: U1.6 U1.7 U6.2 | length 14
  Bottom Layer w0.7: U1.6 U1.7 U6.2
NetU2_2: U2.2 U6.9 | length 68.9
  Top Layer w0.7: v1(53.34,13.97) v1(60.96,13.97) ; v1(53.34,60.96) v1(58.42,60.96)
  Bottom Layer w0.7: U2.2 v1(53.34,13.97) ; U6.9 52.07,64.77 53.34,63.5 v1(53.34,60.96) ; v1(58.42,60.96) 58.55,60.83 58.55,25.27 60.96,22.86 v1(60.96,13.97)
OPAMP_A: Cb.1 U4.3 U4.6 U5.13 | length 79.9
  Top Layer w0.7: v1(54.61,44.45) v1(60.96,44.45) ; v1(66.04,68.58) v1(78.74,68.58)
  Bottom Layer w0.7: U5.13 v1(54.61,44.45) ; v1(60.96,44.45) 60.96,60.96 66.04,66.04 v1(66.04,68.58) 63.5,68.58 60.96,71.12 60.96,76.2 62.23,77.47 U4.3 ; U4.6 Cb.1 v1(78.74,68.58)
OPAMP_B: Ca.1 U4.2 U4.5 U6.13 | length 54.7
  Top Layer w0.7: v1(62.23,66.04) v1(74.93,66.04)
  Bottom Layer w0.7: U6.13 55.88,74.93 57.15,76.2 ; v1(62.23,66.04) 59.69,66.04 57.15,68.58 57.15,76.2 ; U4.2 Ca.1 59.69,80.01 57.15,77.47 57.15,76.2 ; v1(74.93,66.04) U4.5
VIN: CFB_FAA.2 J4_FAA.1 R1D.2 R2FB_FAA.2 R4D.2 U10_FAA.7 | length 90.2
  Bottom Layer w0.7: U10_FAA.7 CFB_FAA.2 13.97,52.07 12.7,50.8 R2FB_FAA.2 7.62,50.8 5.08,53.34 J4_FAA.1 3.81,78.74 19.05,93.98 30.48,93.98 31.75,92.71 R1D.2 34.29,91.44 35.56,90.17 R4D.2
pads on no net: "SUJECION 1.1" "SUJECION 2.1" "SUJECION 3.1" "SUJECION 4.1" J4.2 J4.3 J4_FAA.2 J4_FAA.3 J4_FR.2 J4_FR.3 J5.2 J5.3 J6.2 J6.3 J7.2 J7.3 J8.2 J8.3 J11.2 J11.3 U2.12 U2.13 U9.1 U9.2 U9.3 U9.10 U9.13 U9.14 U9.15

## Polygon pours and split planes (outlines as drawn)
GND on Bottom Layer "Top Overlay-No Net" (solid, remove dead copper, pour order 5): 0,0 43.18,0 43.18,86.36 71.12,86.36 71.12,114.3 0,114.3
GND on Bottom Layer "Top Overlay-No Net" (solid, remove dead copper, pour order 3): 62.23,33.02 62.23,0 100,0 100,33.02

## Keep-outs
Keep-Out Layer:
  the board outline again, w0.254

## Silkscreen, mask and mechanical layers (free items; w line width, h text height)
Top Overlay:
  drawing of 2 lines, arcs and shapes, not listed
  text "-15" at 49.022,108.712 h1.52 r90
  text "GND" at 51.562,108.712 h1.52 r90
  text "+15" at 54.102,108.712 h1.52 r90
  text "ASSD - G1" at 83.312,100.838 h1.52
  text "TP3" at 87.63,98.298 h1.52
  text "COMP" at 89.662,77.978 h1.52
  text "-" at 86.868,74.422 h1.52 r180
  text "+" at 94.742,73.152 h1.52 r90
  text "-" at 97.282,64.262 h1.52 r90
  text "INT" at 97.282,59.182 h1.52 r90
  text "+" at 97.282,56.642 h1.52 r90
  text "+" at 1.778,54.102 h1.52 r180
  text "+" at 97.282,51.562 h1.52 r90
  text "INT" at 97.282,46.482 h1.52 r90
  text "-" at 0.508,46.228 h1.52 r270
  text "-" at 97.282,43.942 h1.52 r90
  text "-" at 2.032,40.132 h1.52 r90
  text "+" at 0.762,37.338 h1.52
  text "-" at 89.662,26.162 h1.52 r90
  text "+" at 3.048,24.892 h1.52 r180
  text "CLK" at 89.662,20.828 h1.52 r90
  text "+" at 88.392,18.288 h1.52
  text "-" at 1.778,17.018 h1.52 r270
  text "DIG_OUT" at 14.732,3.048 h1.52
  text "Q_OUT" at 52.832,3.048 h1.52
  text "+" at 26.162,0.508 h1.52
  text "-" at 33.782,0.508 h1.52
  text "-" at 42.672,0.508 h1.52
  text "+" at 50.292,0.508 h1.52

## Text inside footprints (layer, text, board x,y; h text height)
CF1: Top Overlay "+" at 63.475,104.724 h1.27 r270
CF2: Top Overlay "+" at 40.615,104.724 h1.27 r270